# Altium PCB Board_routed.PcbDoc (part 2 of 4)
Units mm, origin at the board's own origin, x right, y up, seen from the top; angles counter-clockwise.
Board outline 115.4 x 92.5 mm, 2 copper layers (Top Layer, Bottom Layer); 95 components, 82 nets, 440 pads, 192 vias.
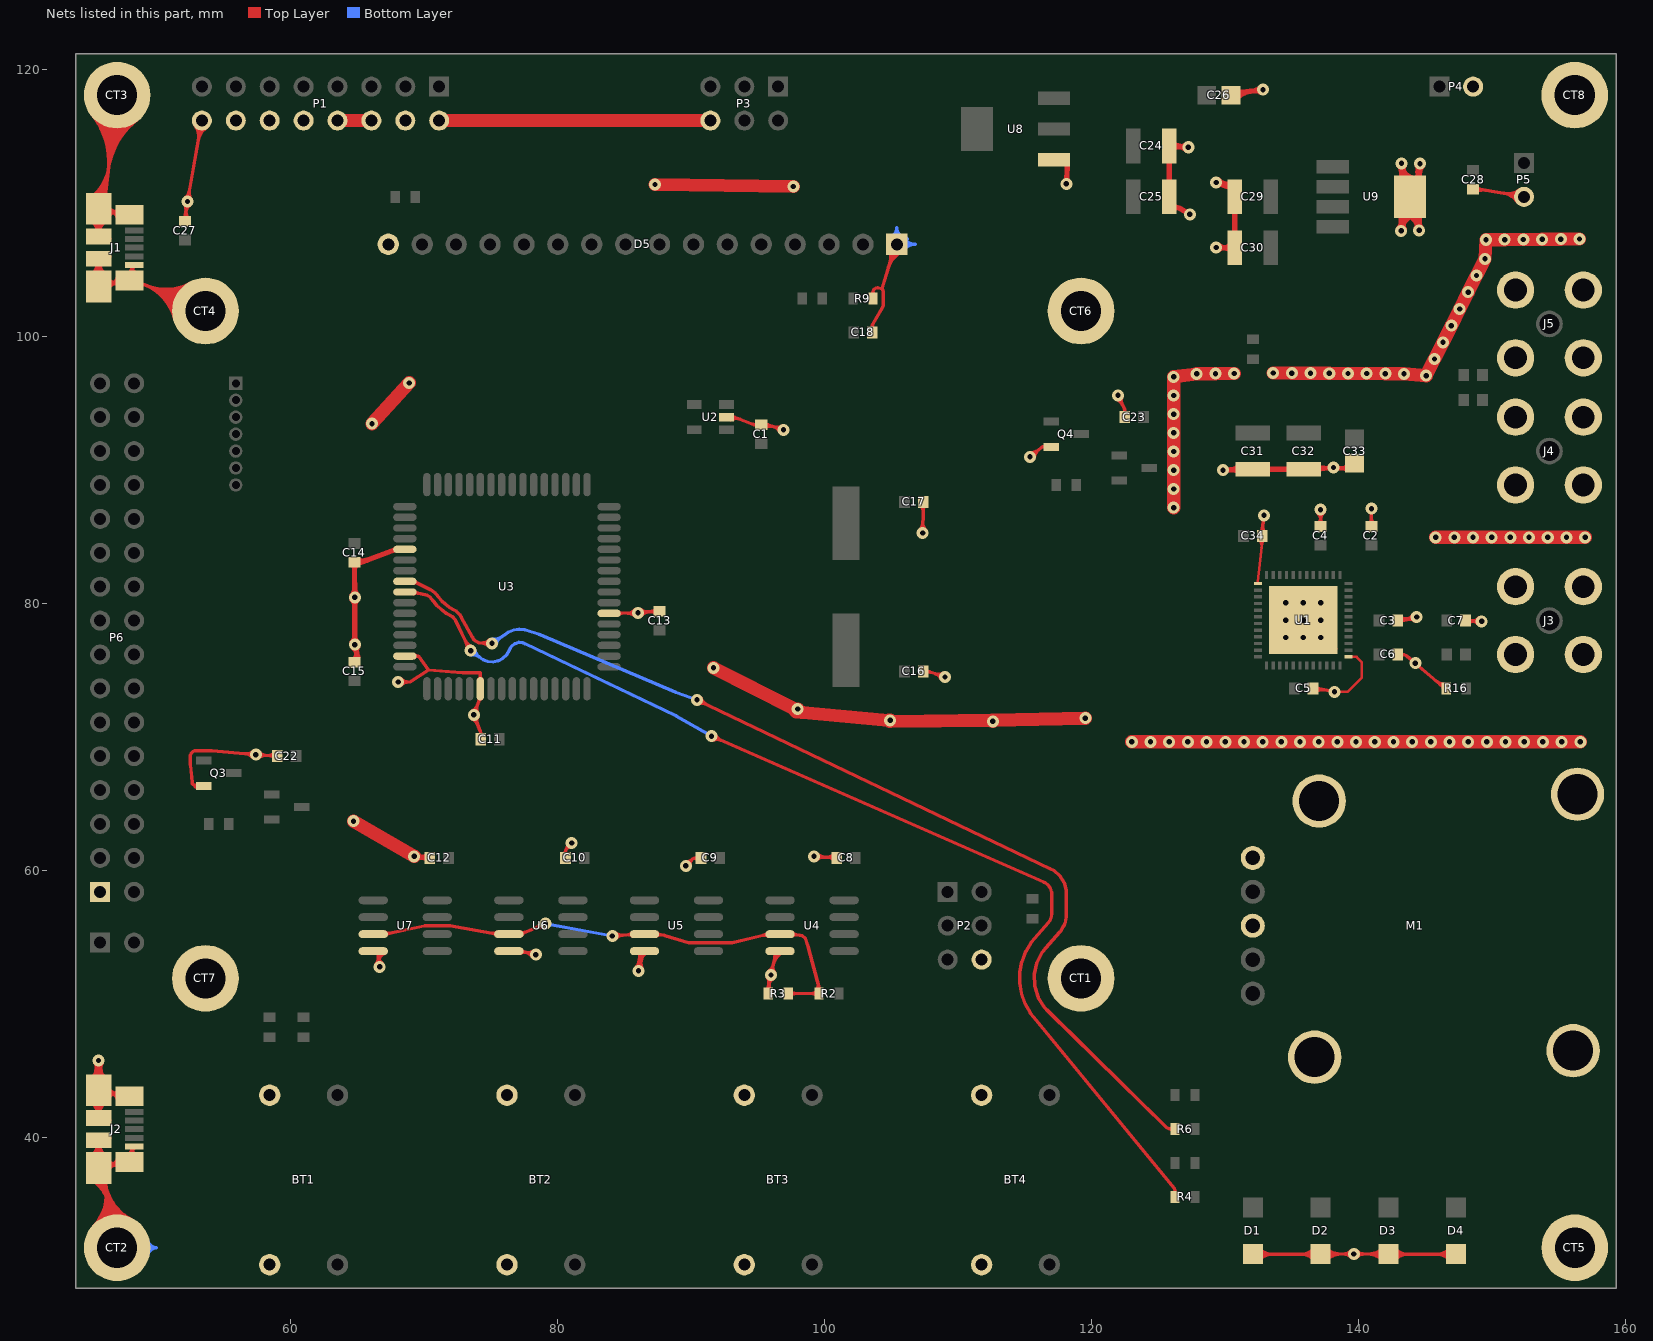
[diagram p2: the nets of this part, all layers, seen from the top]

## Via types
v1: diameter 0.9, hole 0.4, Top Layer to Bottom Layer, 183 vias
v2: diameter 0.8, hole 0.4, Top Layer to Bottom Layer, tented top, 9 vias

## Nets (pads, with @x,y where several pads share a name; then routed paths per layer and width w, separated by ;. In a path a pad name is that pad's centre, name@x,y a point inside that pad or via, vN(x,y) a via of type N, cw(c..) or ccw(c..) an arc to the next point about the centre after c; other vN are vias at no path point) (continued)
EE_NWP: R2.2 R3.2 U4.3 U5.3 U6.3 U7.3 | length 49.4
  Top Layer w0.254: U7.3@66.18,55.245 66.853,55.245 66.98,55.245 66.995,55.245 67.026,55.248 67.041,55.251 69.991,55.861 70.037,55.87 70.133,55.88 70.18,55.88 70.187,55.88 70.473,55.874 70.48,55.874 70.493,55.874 70.499,55.875 70.588,55.879 70.607,55.88 71.353,55.88 71.372,55.879 71.461,55.875 71.468,55.874 71.481,55.874 71.487,55.874 71.773,55.88 71.78,55.88 71.82,55.88 71.9,55.873 71.94,55.866 75.489,55.249 75.501,55.247 75.527,55.245 75.54,55.245 75.667,55.245 U6.3@76.34,55.245 77.013,55.245 77.14,55.245 77.17,55.245 77.228,55.257 77.255,55.268 v1(79.083,56.03) ; U7.3@67.075,55.39 ccw(c67.316,55.756) 67.405,55.326 ; U7.3@67.125,55.15 cw(c67.456,54.932) 67.376,55.32 ; 75.117,55.314 ccw(c75.191,55.74) U6.3@75.44,55.386 ; 75.138,55.31 cw(c75.069,54.914) U6.3@75.399,55.145 ; U6.3@77.206,55.405 ccw(c77.395,55.864) 77.586,55.406 ; U6.3@77.3,55.179 cw(c77.613,55.05) 77.483,55.363 ; v1@78.785,56.153 cw(c78.063,56.45) 78.363,55.73 cw(c78.663,55.01) v1@78.96,55.731 ; v1(84.091,55.109) 85.674,55.244 85.681,55.244 85.694,55.245 85.7,55.245 85.827,55.245 U5.3@86.5,55.245 87.173,55.245 87.3,55.245 87.31,55.245 87.331,55.244 87.342,55.242 87.973,55.153 87.995,55.15 88.037,55.141 88.058,55.135 89.798,54.605 91.961,54.61 92.239,54.61 93.076,54.605 95.634,55.218 95.69,55.232 95.802,55.245 95.86,55.245 95.987,55.245 U4.3@96.66,55.245 97.333,55.245 97.46,55.245 97.469,55.245 97.488,55.244 97.497,55.243 98.145,55.163 98.306,55.143 98.554,54.936 98.604,54.782 98.811,54.14 98.818,54.115 99.568,51.341 99.574,51.319 99.58,51.273 ; v1@84.299,55.356 ccw(c84.802,55.952) 84.868,55.175 ccw(c84.934,54.398) v1@84.338,54.901 ; 85.281,55.21 cw(c85.317,54.791) U5.3@85.588,55.113 ; 85.286,55.211 ccw(c85.251,55.623) U5.3@85.568,55.357 ; U5.3@87.404,55.107 cw(c87.661,54.765) 87.721,55.189 ; U5.3@87.438,55.349 ccw(c87.764,55.594) 87.707,55.191 ; 95.385,55.159 cw(c95.504,54.664) U4.3@95.77,55.098 ; 95.51,55.189 ccw(c95.434,55.506) U4.3@95.713,55.335 ; R3.2@97.27,50.8 97.493,50.8 97.62,50.8 99.23,50.8 99.357,50.8 R2.2@99.58,50.8 99.58,51.123 99.58,51.25 99.58,51.273 ; R3.2@97.428,50.642 cw(c97.808,50.262) 97.808,50.8 cw(c97.808,51.338) R3.2@97.428,50.958 ; U4.3@97.566,55.109 cw(c97.828,54.773) 97.88,55.195 ; U4.3@97.596,55.351 ccw(c97.92,55.603) 97.869,55.197 ; R2.2@99.387,51.011 ccw(c98.613,51.455) 99.474,51.688 ; R2.2@99.422,50.642 ccw(c99.042,50.262) 99.042,50.8 ccw(c99.042,51.338) R2.2@99.422,50.958 ; R2.2@99.474,51.096 ccw(c99.379,51.273) 99.58,51.273 ; R2.2@99.686,51.096 cw(c99.781,51.273) 99.58,51.273
  Bottom Layer w0.254: v1(79.083,56.03) v1(84.091,55.109)
GND: BT1.3 BT1.4 BT2.3 BT2.4 BT3.3 BT3.4 BT4.3 BT4.4 C1.1 C2.1 C3.1 C4.1 C5.1 C6.1 C7.1 C8.1 C9.1 C10.1 C11.1 C12.1 C13.2 C14.1 C15.1 C16.1 C17.1 C18.2 C22.2 C23.2 C24.1 C25.1 C26.1 C27.2 C28.2 C29.1 C30.1 C31.1 C32.1 C33.1 C34.2 CT1.1 CT2.1 CT3.1 CT4.1 CT5.1 CT6.1 CT7.1 CT8.1 D1.2 D2.2 D3.2 D4.2 D5.1 D5.16 J1.5 J1.DP0 J1.DP1 J1.DP2 J1.DP3 J1.DP4 J1.DP5 J2.5 J2.DP0 J2.DP1 J2.DP2 J2.DP3 J2.DP4 J2.DP5 J3.2 J3.3 J3.4 J3.5 J4.2 J4.3 J4.4 J4.5 J5.2 J5.3 J5.4 J5.5 M1.3 M1.5 M1.DP0 M1.DP1 M1.DP2 M1.DP3 P1.2 P1.4 P1.6 P1.8 P1.10 P1.12 P1.14 P1.16 P2.6 P3.6 P4.2 P5.2 P6.1 Q3.2 Q4.2 R3.1 R9.1 R16.2 U1.1 U1.25 U1.49 U2.2 U3.6 U3.22 U3.53 U3.63 U4.4 U5.4 U6.4 U7.4 U8.1 U9.5 | length 770.7
  Top Layer w0.2: C34.2@132.546,84.852 cw(c131.863,84.301) 132.736,84.207 ; U1.1@132.66,81.52 U1.1@132.46,81.52 132.46,81.645 132.778,84.597 132.779,84.608 132.78,84.629 ; C34.2@132.689,84.754 cw(c132.649,84.629) 132.78,84.629 ; 132.759,84.423 cw(c133.326,84.362) C34.2@132.968,84.806 ; C34.2@132.78,85.09 132.78,84.629 ; C34.2@132.871,84.754 ccw(c132.911,84.629) 132.78,84.629 ; U1.49@133.71,81.22 v2(135.86,78.77) U1.49@138.31,76.62 ; U1.49@133.982,80.91 cw(c133.13,80.163) U1.49@134.261,80.09 ; U1.49@134.3,80.547 cw(c133.812,80.119) U1.49@134.46,80.077 ; U1.49@134.363,80.476 ccw(c134.6,80.684) U1.49@134.58,80.369 ; U1.49@134.54,79.771 cw(c134.467,78.64) U1.49@135.318,79.387 ; U1.49@134.553,79.97 cw(c134.511,79.322) U1.49@135,79.75 ; U1.49@134.859,80.05 ccw(c135.174,80.03) U1.49@134.937,79.822 ; U1.49@135.561,78.79 ccw(c134.838,78.837) 135.382,79.314 ccw(c135.927,79.792) U1.49@135.88,79.069 ; U1.49@135.88,78.471 cw(c135.927,77.748) 136.404,78.292 cw(c136.882,78.837) U1.49@136.159,78.79 ; U1.49@136.477,78.228 cw(c135.73,77.377) U1.49@136.861,77.45 ; U1.49@136.84,77.91 cw(c136.412,77.421) U1.49@137.06,77.463 ; U1.49@136.912,77.847 ccw(c137.12,78.084) U1.49@137.14,77.769 ; U1.49@137.167,77.37 cw(c137.209,76.722) U1.49@137.637,77.21 ; U1.49@137.18,77.171 cw(c137.253,76.04) U1.49@138,76.892 ; U1.49@137.459,77.49 ccw(c137.774,77.51) U1.49@137.566,77.273 ; v1(138.197,73.404) 139.179,73.404 140.25,74.475 140.25,75.615 139.845,76.02 U1.25@139.26,76.02
  Top Layer w0.254: J2.DP4@45.018,44.372 ccw(c43.618,45.775) v1(45.6,45.775) ; J2.DP1@45.052,38.579 ccw(c43.96,39.802) J2.DP2@45.6,39.803 ccw(c47.24,39.802) J2.DP1@46.148,38.579 ; J2.DP4@45.052,42.701 cw(c43.96,41.478) J2.DP3@45.6,41.477 cw(c47.24,41.478) J2.DP4@46.148,42.701 ; J1.DP1@45.052,104.619 ccw(c43.96,105.842) J1.DP2@45.6,105.843 ccw(c47.24,105.842) J1.DP1@46.148,104.619 ; J1.DP4@45.052,108.741 cw(c43.96,107.518) J1.DP3@45.6,107.517 cw(c47.24,107.518) J1.DP4@46.148,108.741 ; J1.DP4@45.091,110.476 ccw(c43.007,113.122) 46.351,112.725 ; CT3.1@45.126,116.641 cw(c40.626,113.096) 46.315,112.421 cw(c52.004,111.746) CT3.1@48.459,116.246 ; J1.DP4@45.129,110.505 ccw(c43.506,112.833) 46.324,112.498 ; J2.DP1@45.132,36.813 cw(c43.348,34.232) 46.434,34.796 ; J2.DP4@45.198,44.193 ccw(c44.23,45.162) 45.6,45.162 ccw(c46.97,45.162) J2.DP4@46.002,44.193 ; J2.DP1@45.221,38.39 ccw(c44.466,39.235) 45.6,39.235 ccw(c46.734,39.235) J2.DP1@45.979,38.39 ; J2.DP4@45.221,42.89 cw(c44.466,42.045) 45.6,42.045 cw(c46.734,42.045) J2.DP4@45.979,42.89 ; J1.DP1@45.221,104.43 ccw(c44.466,105.275) 45.6,105.275 ccw(c46.734,105.275) J1.DP1@45.979,104.43 ; J1.DP4@45.221,108.93 cw(c44.466,108.085) 45.6,108.085 cw(c46.734,108.085) J1.DP4@45.979,108.93 ; CT2.1@45.236,33.349 ccw(c42.54,35.808) 46.13,36.463 ; J1.DP4@45.248,110.277 ccw(c43.543,112.441) 46.279,112.116 ; J2.DP2@45.274,39.477 cw(c44.488,38.691) 45.6,38.691 cw(c46.712,38.691) J2.DP2@45.926,39.477 ; J2.DP3@45.274,41.803 ccw(c44.488,42.589) 45.6,42.589 ccw(c46.712,42.589) J2.DP3@45.926,41.803 ; J1.DP2@45.274,105.517 cw(c44.488,104.731) 45.6,104.731 cw(c46.712,104.731) J1.DP2@45.926,105.517 ; J1.DP3@45.274,107.843 ccw(c44.488,108.629) 45.6,108.629 ccw(c46.712,108.629) J1.DP3@45.926,107.843 ; J1.DP4@45.275,110.297 ccw(c43.939,112.211) 46.257,111.936 ; J2.DP1@45.276,37.022 cw(c43.841,34.946) 46.324,35.399 ; v1@45.32,45.614 cw(c44.645,45.224) 45.398,45.022 cw(c46.151,44.82) v1@45.761,45.495 ; CT3.1@45.325,116.799 cw(c41.307,113.633) 46.387,113.03 cw(c51.467,112.427) CT3.1@48.301,116.445 ; J2.DP1@45.327,36.714 cw(c44.837,35.32) 46.29,35.585 ; v1@45.372,45.547 cw(c44.82,44.995) 45.6,44.995 cw(c46.38,44.995) v1@45.828,45.547 ; J1.DP4@45.405,110.077 ccw(c44.08,111.759) 46.206,111.507 ; J2.DP1@45.411,36.953 cw(c45.004,35.795) 46.212,36.016 ; J2.DP1@45.421,37.231 cw(c44.334,35.659) 46.214,36.002 ; J1.DP4@45.42,110.088 ccw(c44.373,111.59) 46.191,111.374 ; CT2.1@45.424,33.178 ccw(c43.016,35.374) 46.222,35.959 ccw(c49.428,36.544) CT2.1@47.951,33.639 ; v1@45.439,45.495 cw(c45.049,44.82) 45.802,45.022 cw(c46.555,45.224) v1@45.88,45.614 ; J2.DP1@45.492,38.781 ccw(c45.465,38.986) 45.665,38.932 ; J2.DP4@45.492,42.499 cw(c45.465,42.294) 45.665,42.348 ; J1.DP1@45.492,104.821 ccw(c45.465,105.026) 45.665,104.972 ; J1.DP4@45.492,108.539 cw(c45.465,108.334) 45.665,108.388 ; J2.DP1@45.497,37.192 cw(c45.183,36.281) 46.132,36.453 ; CT3.1@45.525,116.956 cw(c41.988,114.17) 46.459,113.639 cw(c50.93,113.108) CT3.1@48.144,116.645 ; 45.535,38.932 ccw(c45.735,38.986) J2.DP1@45.708,38.781 ; 45.535,42.348 cw(c45.735,42.294) J2.DP4@45.708,42.499 ; 45.535,104.972 ccw(c45.735,105.026) J1.DP1@45.708,104.821 ; 45.535,108.388 cw(c45.735,108.334) J1.DP4@45.708,108.539 ; J1.DP4@45.562,109.878 ccw(c44.617,111.078) 46.134,110.898 ; CT2.1@45.612,33.007 ccw(c43.492,34.939) 46.314,35.454 ccw(c49.136,35.969) CT2.1@47.835,33.412 ; P6.1@45.72,58.42 P6.1@46.343,58.097 ; CT3.1@45.725,117.113 cw(c42.669,114.706) 46.532,114.248 cw(c50.394,113.789) CT3.1@47.987,116.845 ; CT2.1@45.8,32.835 ccw(c43.969,34.505) 46.406,34.95 ccw(c48.844,35.394) CT2.1@47.72,33.186 ; CT3.1@45.924,117.27 cw(c43.351,115.243) 46.604,114.857 cw(c49.857,114.471) CT3.1@47.83,117.044 ; CT2.1@45.987,32.664 ccw(c44.445,34.07) 46.498,34.445 ccw(c48.551,34.82) CT2.1@47.605,32.96 ; J2.DP1@46.105,38.228 ccw(c46.558,38.464) 46.558,37.953 ; J2.DP4@46.105,43.052 cw(c46.558,42.816) 46.558,43.328 ; J1.DP1@46.105,104.268 ccw(c46.558,104.504) 46.558,103.993 ; J1.DP4@46.105,109.092 cw(c46.558,108.856) 46.558,109.368 ; 46.123,110.803 cw(c44.823,110.958) J1.DP4@45.565,109.88 ; 46.123,110.808 cw(c44.813,110.964) J1.DP4@45.565,109.88 ; 46.124,110.812 cw(c44.806,110.969) J1.DP4@45.565,109.88 ; CT3.1@46.124,117.427 cw(c44.032,115.78) 46.676,115.466 cw(c49.32,115.152) CT3.1@47.673,117.244 ; 46.133,36.446 ccw(c45.171,36.27) 45.496,37.193 cw(c45.167,36.267) 46.134,36.443 ; J2.DP4@46.182,44.372 cw(c47.582,45.775) v1(45.6,45.775) ; J2.DP1@46.32,37.566 cw(c46.977,37.201) J2.DP0@46.977,37.953 ; J2.DP4@46.32,43.714 ccw(c46.977,44.079) J2.DP5@46.977,43.328 ; J1.DP1@46.32,103.606 cw(c46.977,103.241) J1.DP0@46.977,103.993 ; J1.DP4@46.32,109.754 ccw(c46.977,110.119) J1.DP5@46.977,109.368 ; J2.DP1@46.33,38.345 ccw(c46.977,38.682) J2.DP0@46.977,37.953 ; J2.DP4@46.33,42.935 cw(c46.977,42.598) J2.DP5@46.977,43.328 ; J1.DP1@46.33,104.385 ccw(c46.977,104.722) J1.DP0@46.977,103.993 ; J1.DP4@46.33,108.975 cw(c46.977,108.638) J1.DP5@46.977,109.368 ; J2.DP2@46.423,39.963 J2.DP2@45.6,39.803 J2.DP1@45.6,37.727 ; J2.DP3@46.423,41.317 J2.DP3@45.6,41.477 J2.DP4@45.6,43.553 ; J1.DP2@46.423,106.003 J1.DP2@45.6,105.843 J1.DP1@45.6,103.767 J1.DP1@46.423,103.993 ; J1.DP3@46.423,107.357 J1.DP3@45.6,107.517 J1.DP4@45.6,109.593 ; 46.658,37.953 cw(c46.658,37.248) J2.DP0@47.156,37.746 ; 46.657,43.328 ccw(c46.657,44.033) J2.DP5@47.156,43.534 ; 46.658,103.993 cw(c46.658,103.288) J1.DP0@47.156,103.786 ; 46.657,109.368 ccw(c46.657,110.073) J1.DP5@47.156,109.574 ; 46.777,37.953 ccw(c46.777,38.452) J2.DP0@47.25,38.292 ; 46.777,43.328 cw(c46.777,42.828) J2.DP5@47.25,42.988 ; 46.777,103.993 ccw(c46.777,104.492) J1.DP0@47.25,104.332 ; 46.777,109.368 cw(c46.777,108.868) J1.DP5@47.25,109.028 ; CT2.1@46.99,31.75 46.13,36.463 ; CT3.1@46.99,118.11 46.126,110.83 46.125,110.818 46.123,110.792 46.123,110.653 J1.DP4@45.6,109.593 ; J2.DP0@47.009,38.373 cw(c46.423,38.571) J2.DP1@46.423,37.953 ; J2.DP5@47.009,42.907 ccw(c46.423,42.709) J2.DP4@46.423,43.328 ; J1.DP0@47.009,104.413 cw(c46.423,104.611) J1.DP1@46.423,103.993 ; J1.DP5@47.009,108.947 ccw(c46.423,108.749) J1.DP4@46.423,109.368 ; J2.DP0@47.807,38.634 ccw(c47.267,39.242) J2.5@48.08,39.242 ; J1.DP0@47.807,104.674 ccw(c47.267,105.282) J1.5@48.08,105.282 ; J2.DP5@47.9,43.102 J2.DP5@46.977,43.328 ; J1.DP5@47.9,109.142 J1.DP5@46.977,109.368 ; CT2.1@48.066,33.865 cw(c49.72,37.118) 46.13,36.463 ; J2.DP0@48.08,38.76 cw(c48.726,38.76) J2.5@48.321,39.264 ; J1.DP0@48.08,104.8 cw(c48.726,104.8) J1.5@48.321,105.304 ; J2.5@48.26,39.34 J2.5@48.08,39.242 ; J1.5@48.26,105.38 J1.5@48.08,105.282 ; J2.DP0@48.423,38.751 cw(c48.603,39.242) J2.5@48.08,39.242 ; J1.DP0@48.423,104.791 cw(c48.603,105.282) J1.5@48.08,105.282 ; J1.DP0@48.555,104.317 ccw(c49.117,104.48) 48.999,103.906 ; J1.DP0@48.561,104.295 ccw(c49.042,104.4) J1.DP0@48.942,103.918 ; J1.DP0@48.643,103.785 cw(c48.939,103.488) J1.DP0@48.94,103.908 ; CT4.1@51.317,101.324 ccw(c47.592,100.334) 49.119,103.872 ; CT4.1@51.562,101.389 ccw(c48.236,100.505) 49.6,103.665 ccw(c50.964,106.825) CT4.1@52.602,103.798 ; CT4.1@51.808,101.455 ccw(c48.88,100.676) 50.081,103.457 ccw(c51.281,106.239) CT4.1@52.723,103.574 ; C27.2@51.96,108.871 ccw(c51.763,109.142) 52.094,109.09 ; C27.2@51.98,108.908 ccw(c51.925,109.067) 52.093,109.067 ; v1@52,109.952 cw(c51.369,109.494) 52.139,109.371 cw(c52.909,109.249) v1@52.451,109.88 ; CT4.1@52.053,101.52 ccw(c49.524,100.848) 50.561,103.25 ccw(c51.598,105.652) CT4.1@52.843,103.351 ; C27.2@52.07,108.65 52.093,108.923 52.093,109.067 ; v1@52.077,110.406 ccw(c51.63,111.046) 52.398,110.909 ccw(c53.166,110.773) v1@52.526,110.326 ; 52.166,109.542 ccw(c53.137,109.387) C27.2@52.341,108.81 ; C27.2@52.198,108.891 cw(c52.292,109.067) 52.093,109.067 ; CT4.1@52.299,101.585 ccw(c50.169,101.019) 51.042,103.042 ccw(c51.916,105.066) CT4.1@52.964,103.128 ; CT4.1@52.481,104.021 cw(c50.647,107.411) 49.119,103.872 ; 52.643,66.497 ccw(c52.873,66.751) Q3.2@53.097,66.491 ; P1.16@52.829,115.848 cw(c51.596,114.988) 53.077,114.724 cw(c54.557,114.461) P1.16@53.697,115.694 ; 52.856,66.304 ccw(c53.062,66.532) Q3.2@53.263,66.299 ; P1.16@53.037,115.994 cw(c52.307,115.484) 53.184,115.328 cw(c54.061,115.172) P1.16@53.551,115.902 ; Q3.2@53.087,66.238 ccw(c52.794,65.947) 52.794,66.36 ; Q3.2@53.087,66.482 cw(c52.794,66.773) 52.794,66.36 ; P1.16@53.34,116.205 v1(52.261,110.141) 52.098,109.117 52.096,109.1 52.093,109.067 ; Q3.2@53.485,66.36 52.794,66.36 ; CT4.1@53.61,101.934 49.119,103.872 ; v1@57.133,68.49 ccw(c56.535,67.989) 56.603,68.765 ccw(c56.672,69.542) v1@57.173,68.945 ; v1@57.59,68.451 cw(c58.096,67.858) 58.158,68.636 cw(c58.219,69.413) v1@57.626,68.907 ; 58.185,68.634 ccw(c58.252,69.494) C22.2@58.813,68.838 ; 58.472,68.611 cw(c58.436,68.157) C22.2@58.782,68.453 ; C22.2@58.731,68.495 ccw(c58.582,68.446) 58.582,68.603 ; C22.2@58.747,68.704 cw(c58.582,68.788) 58.582,68.603 ; C22.2@58.748,68.453 ccw(c58.494,68.318) 58.506,68.606 ccw(c58.518,68.907) C22.2@58.766,68.736 ; C22.2@58.752,68.446 ccw(c58.475,68.289) 58.488,68.607 ccw(c58.502,68.94) C22.2@58.77,68.742 ; C22.2@58.99,68.58 58.717,68.603 58.582,68.603 ; C15.1@64.77,75.63 64.795,75.63 C15.1@64.795,75.662 ; U7.4@66.18,53.975 66.553,53.802 66.553,53.662 66.554,53.637 66.556,53.624 v1(66.654,52.8) ; v1@66.401,53 ccw(c65.788,53.482) 66.562,53.574 ccw(c67.336,53.667) v1@66.854,53.054 ; 66.576,53.454 cw(c67.133,53.521) U7.4@66.954,54.052 ; v1@66.613,53.144 cw(c67.234,53.218) U7.4@67.035,53.811 ; v1(68.045,74.139) 68.919,74.143 70.31,75.038 70.316,75.041 ; v1@68.273,74.368 ccw(c68.822,74.922) 68.825,74.142 ccw(c68.829,73.363) v1@68.275,73.912 ; U3.63@68.55,76.08 69.023,76.08 69.573,76.081 70.316,75.042 ; U3.63@69.255,75.976 cw(c69.509,75.723) 69.508,76.081 ; U3.63@69.254,76.185 ccw(c69.506,76.437) 69.507,76.081 ; 70.02,60.983 C12.1@70.147,60.983 ; v1@73.577,71.97 ccw(c73.254,72.68) 73.984,72.406 ccw(c74.714,72.132) v1@74.004,71.809 ; v1@73.583,71.379 cw(c73.276,70.662) 74,70.952 cw(c74.724,71.242) v1@74.007,71.549 ; U3.6@74.065,72.969 cw(c73.685,72.796) 74.076,72.65 ; U3.6@74.095,74.335 ccw(c73.846,74.584) 74.198,74.584 ; 74.106,72.729 cw(c74.384,72.624) U3.6@74.261,72.895 ; C11.1@74.11,70.145 ccw(c74.014,70.338) 74.23,70.338 ; U3.6@74.199,73.776 74.198,74.839 72.869,74.845 70.316,75.042 ; 74.198,74.591 ccw(c74.56,74.591) U3.6@74.305,74.335 ; U3.6@74.2,73.776 U3.6@74.2,73.63 74.2,73.03 74.2,73.005 74.191,72.956 74.182,72.933 v1(73.71,71.676) 74.201,70.449 74.216,70.413 74.23,70.339 ; C11.1@74.23,69.85 74.23,70.339 ; C11.1@74.35,70.145 cw(c74.446,70.338) 74.23,70.338 ; U6.4@76.34,53.975 77.157,53.975 77.19,53.971 77.207,53.967 v1(78.362,53.704) ; U6.4@77.232,53.829 cw(c77.468,53.453) 77.567,53.885 ; U6.4@77.286,54.067 ccw(c77.618,54.276) 77.531,53.894 ; v1@78.089,53.532 ccw(c77.428,53.117) 77.602,53.877 ccw(c77.775,54.638) v1@78.19,53.978 ; C10.1@80.443,61.246 ccw(c80.305,61.484) 80.58,61.484 ; C10.1@80.58,60.96 80.58,61.484 ; C10.1@80.717,61.246 cw(c80.855,61.484) 80.58,61.484 ; v1@80.728,62.003 cw(c80.319,61.903) 80.633,61.622 ; v1@80.967,61.766 ccw(c80.899,61.482) 80.682,61.677 ; v1@80.967,61.766 ccw(c80.899,61.482) 80.682,61.677 ; v1@81.001,61.759 ccw(c80.948,61.339) 80.633,61.622 ; v1(81.042,62.08) 80.682,61.677 ; U3.22@83.85,79.28 84.45,79.28 84.457,79.28 v1(86.021,79.318) 87.137,79.438 87.148,79.439 87.17,79.44 ; U3.22@84.552,79.387 ccw(c84.799,79.646) 84.807,79.289 ccw(c84.816,78.932) U3.22@84.557,79.178 ; v1@85.787,79.541 cw(c85.223,80.079) 85.242,79.299 cw(c85.261,78.52) v1@85.799,79.084 ; v1@85.837,52.735 ccw(c85.323,53.321) 86.101,53.27 ccw(c86.88,53.219) v1@86.293,52.705 ; v1@85.908,52.782 ccw(c85.657,53.289) 86.193,53.107 ; v1(86.05,52.492) 86.126,53.647 86.127,53.675 86.127,53.802 U5.4@86.5,53.975 ; v1@86.066,52.734 cw(c87.681,52.628) U5.4@86.614,53.845 ; 86.106,53.346 cw(c87.109,53.28) U5.4@86.447,54.036 ; v1@86.224,79.57 ccw(c86.714,80.177) 86.797,79.401 ccw(c86.88,78.626) v1@86.273,79.116 ; 86.29,53.394 ccw(c87.232,53.075) v1@86.34,52.635 ; 86.812,79.403 cw(c86.899,78.596) C13.2@87.409,79.228 ; 87.027,79.426 ccw(c86.973,79.929) C13.2@87.368,79.611 ; C13.2@87.328,79.334 ccw(c87.17,79.268) 87.17,79.44 ; C13.2@87.328,79.546 cw(c87.17,79.612) 87.17,79.44 ; C13.2@87.63,79.44 87.17,79.44 ; v1(89.6,60.36) 90.033,60.807 ; v1@89.65,60.679 ccw(c89.718,61.113) 90.033,60.807 ; v1@89.917,60.42 cw(c90.348,60.502) 90.033,60.807 ; C9.1@90.498,61.086 cw(c90.253,61.212) 90.253,60.937 ; C9.1@90.518,60.801 ccw(c90.253,60.611) 90.253,60.937 ; C9.1@90.74,60.96 90.467,60.937 90.253,60.937 ; U2.2@92.64,93.98 93.22,93.98 ; U2.2@92.945,93.799 cw(c93.331,92.928) 93.674,93.816 ; U2.2@93.034,93.876 cw(c93.22,93.761) 93.22,93.98 ; U2.2@93.034,94.084 ccw(c93.22,94.199) 93.22,93.98 ; C1.1@94.955,93.29 ccw(c94.763,93.196) 94.763,93.41 ; C1.1@94.955,93.53 cw(c94.763,93.624) 94.763,93.41 ; C1.1@95.309,93.393 cw(c95.551,92.919) 95.715,93.426 ; C1.1@95.424,93.167 cw(c95.946,92.147) 96.298,93.237 ; C1.1@95.547,93.293 cw(c95.732,93.205) 95.732,93.41 ; C1.1@95.547,93.527 ccw(c95.732,93.615) 95.732,93.41 ; R3.1@95.666,51.097 ccw(c95.574,51.27) 95.77,51.27 ; v1@95.705,52.014 cw(c95.042,51.603) 95.802,51.425 cw(c96.561,51.247) v1@96.15,51.91 ; R3.1@95.77,50.8 95.77,51.27 ; v1@95.803,52.455 ccw(c95.379,53.109) 96.142,52.947 ccw(c96.904,52.785) v1@96.25,52.36 ; 95.855,51.654 ccw(c96.675,51.462) R3.1@95.959,51.018 ; R3.1@95.874,51.097 cw(c95.966,51.27) 95.77,51.27 ; 96.141,52.943 cw(c97.509,52.652) U4.4@96.753,53.829 ; 96.268,53.539 cw(c97.046,53.373) 96.616,54.043 ccw(c97.039,53.378) 96.268,53.543 ; 96.271,53.553 cw(c97.018,53.393) U4.4@96.618,54.044 ; v1@96.635,92.888 ccw(c95.94,92.533) 96.18,93.275 ccw(c96.42,94.017) v1@96.775,93.323 ; U4.4@96.66,53.975 96.287,53.802 96.287,53.652 96.282,53.608 96.278,53.586 v1(95.979,52.184) 95.779,51.33 95.775,51.31 95.77,51.27 ; v1(96.922,93.035) 95.823,93.391 95.793,93.4 95.732,93.41 ; v1(99.2,61.075) 100.47,60.984 100.477,60.984 100.493,60.983 ; v1@99.412,60.831 cw(c99.923,60.241) 99.978,61.019 cw(c100.034,61.797) v1@99.444,61.286 ; 100.102,61.01 ccw(c100.163,61.86) C8.1@100.721,61.216 ; 100.375,60.991 cw(c100.341,60.526) C8.1@100.694,60.831 ; C8.1@100.64,60.876 ccw(c100.493,60.828) 100.493,60.983 ; C8.1@100.657,61.084 cw(c100.493,61.167) 100.493,60.983 ; C8.1@100.663,60.825 ccw(c100.383,60.665) 100.395,60.987 ccw(c100.408,61.327) C8.1@100.681,61.123 ; C8.1@100.667,60.819 ccw(c100.366,60.637) 100.38,60.987 ccw(c100.394,61.358) C8.1@100.685,61.129 ; C8.1@100.9,60.96 100.627,60.983 100.493,60.983 ; C18.2@103.442,100.621 ccw(c103.33,100.833) 103.57,100.833 ; R9.1@103.492,103.152 ccw(c103.318,103.399) 103.62,103.399 ; C18.2@103.57,100.33 103.57,100.833 ; R9.1@103.62,102.87 103.62,103.399 ; C18.2@103.698,100.621 cw(c103.81,100.833) 103.57,100.833 ; R9.1@103.748,103.152 cw(c103.922,103.399) 103.62,103.399 ; 104.762,105.165 cw(c106.663,104.588) D5.1@105.727,106.34 ; D5.1@104.816,106.617 cw(c103.703,106.022) 104.911,105.655 ; D5.1@104.861,106.545 cw(c104.217,106.088) 104.973,105.858 cw(c105.523,105.691) D5.1@105.471,106.264 ; D5.1@104.934,106.458 cw(c104.686,106.21) D5.1@105.037,106.21 ; 104.94,105.752 cw(c106.255,105.353) D5.1@105.607,106.564 ; D5.1@105.05,106.192 cw(c105.834,106.076) D5.1@105.483,106.786 ; D5.1@105.41,106.934 105.037,106.261 105.037,106.103 105.028,106.04 105.019,106.01 104.29,103.61 ; v1@107.118,85.536 ccw(c106.578,86.098) 107.357,86.082 ccw(c108.137,86.066) v1@107.574,85.526 ; C17.1@107.183,87.391 cw(c106.687,86.915) 107.374,86.901 ; v1(107.341,85.302) 107.38,87.172 107.38,87.18 C17.1@107.38,87.63 ; 107.375,86.941 cw(c108.006,86.928) C17.1@107.569,87.383 ; C16.1@107.38,74.93 107.653,74.907 107.815,74.907 ; C16.1@107.616,74.792 cw(c107.815,74.676) 107.815,74.907 ; C16.1@107.634,75.03 ccw(c107.815,75.102) 107.815,74.907 ; v1@108.727,74.367 ccw(c108.027,74.023) 108.279,74.761 ccw(c108.53,75.499) v1@108.874,74.799 ; v1(109.017,74.509) 107.918,74.884 107.885,74.895 107.815,74.907 ; v1(115.385,91.011) 116.22,91.692 116.26,91.725 116.358,91.76 ; v1@115.417,91.332 ccw(c115.496,92.108) 115.989,91.504 ccw(c116.482,90.9) v1@115.706,90.978 ; Q4.2@116.573,91.654 ccw(c116.358,91.489) 116.358,91.76 ; Q4.2@116.573,91.866 cw(c116.358,92.031) 116.358,91.76 ; Q4.2@116.985,91.76 116.358,91.76 ; U8.1@117.2,113.27 117.9,113.27 U8.1@118.108,113.259 ; v1@121.864,95.315 cw(c121.599,94.582) 122.305,94.913 cw(c123.011,95.244) v1@122.278,95.509 ; v1(121.974,95.619) 122.452,94.6 122.471,94.56 122.49,94.474 ; C23.2@122.367,94.274 ccw(c122.265,94.474) 122.49,94.474 ; C23.2@122.49,93.98 122.49,94.474 ; C23.2@122.613,94.274 cw(c122.715,94.474) 122.49,94.474 ; v1@127.228,114.259 v1(127.255,114.204) ; C26.1@130.44,118.11 C26.1@130.454,118.165 ; D1.2@132.08,31.27 D2.2@137.16,31.27 137.783,31.28 v1(139.645,31.28) 141.617,31.28 D3.2@142.24,31.27 D4.2@147.32,31.27 ; D1.2@132.341,31.009 cw(c132.971,30.379) 132.971,31.27 cw(c132.971,32.161) D1.2@132.341,31.531 ; D1.2@132.521,30.829 cw(c133.584,29.766) 133.584,31.27 cw(c133.584,32.774) D1.2@132.521,31.711 ; C34.2@132.615,85.357 ccw(c132.334,85.726) 132.793,85.663 ; C34.2@132.673,85.391 ccw(c132.603,85.553) 132.78,85.553 ; C34.2@132.78,85.09 132.78,85.553 ; 132.83,85.938 ccw(c133.678,85.823) C34.2@132.997,85.305 ; C34.2@132.887,85.391 cw(c132.957,85.553) 132.78,85.553 ; v1(132.924,86.628) 132.784,85.594 132.782,85.581 132.78,85.553 ; C5.1@136.59,73.66 136.863,73.637 137.011,73.637 ; D2.2@136.719,30.829 ccw(c135.656,29.766) 135.656,31.27 ccw(c135.656,32.774) D2.2@136.719,31.711 ; C5.1@136.741,73.383 cw(c137.321,72.512) 137.527,73.538 ; C5.1@136.817,73.761 ccw(c137.043,73.912) 136.99,73.646 ; C5.1@136.83,73.529 cw(c137.011,73.43) 137.011,73.637 ; C5.1@136.847,73.752 ccw(c137.011,73.812) 137.011,73.637 ; D2.2@136.899,31.009 ccw(c136.269,30.379) 136.269,31.27 ccw(c136.269,32.161) D2.2@136.899,31.531 ; v1@136.929,86.823 cw(c136.378,86.271) 137.157,86.271 cw(c137.937,86.271) v1@137.386,86.823 ; C4.1@136.967,85.983 ccw(c136.507,86.443) 137.157,86.443 ; 137.157,86.456 ccw(c137.826,86.456) C4.1@137.353,85.983 ; v1(137.157,87.051) 137.157,86.063 C4.1@137.16,85.79 ; D2.2@137.421,31.009 cw(c138.076,30.354) 138.076,31.28 ; D2.2@137.421,31.531 ccw(c138.025,32.135) 138.025,31.28 ; D2.2@137.601,30.829 cw(c138.689,29.741) 138.689,31.28 ; D2.2@137.601,31.711 ccw(c138.639,32.749) 138.639,31.28 ; v1(138.197,73.404) 137.074,73.629 137.053,73.633 137.011,73.637 ; C33.1@139.127,90.267 C33.1@139.7,90.54 ; v1@139.417,31.052 ccw(c138.865,30.501) 138.865,31.28 ccw(c138.865,32.06) v1@139.417,31.509 ; v1@139.873,31.052 cw(c140.425,30.501) 140.425,31.28 cw(c140.425,32.06) v1@139.873,31.509 ; 140.711,31.28 cw(c140.711,29.741) D3.2@141.799,30.829 ; 140.761,31.28 ccw(c140.761,32.749) D3.2@141.799,31.711 ; C2.1@140.777,85.983 ccw(c140.318,86.442) 140.967,86.442 ; 140.967,86.456 ccw(c141.636,86.456) C2.1@141.163,85.983 ; v1(140.967,87.128) 140.967,86.063 C2.1@140.97,85.79 ; 141.324,31.28 cw(c141.324,30.354) D3.2@141.979,31.009 ; 141.375,31.28 ccw(c141.375,32.135) D3.2@141.979,31.531 ; D3.2@142.501,31.009 cw(c143.131,30.379) 143.131,31.27 cw(c143.131,32.161) D3.2@142.501,31.531 ; D3.2@142.681,30.829 cw(c143.744,29.766) 143.744,31.27 cw(c143.744,32.774) D3.2@142.681,31.711 ; C6.1@142.94,76.2 143.213,76.177 143.34,76.177 143.414,76.177 ; C3.1@142.94,78.74 143.213,78.763 143.367,78.763 ; C3.1@142.95,78.806 ccw(c143.216,79.26) 143.348,78.751 ; C3.1@143.078,79.025 ccw(c143.655,80.008) v1@143.942,78.905 ; C6.1@143.165,76.046 cw(c143.414,75.876) 143.414,76.177 ; C3.1@143.178,78.874 ccw(c143.367,78.979) 143.367,78.763 ; C6.1@143.185,76.32 ccw(c143.414,76.432) 143.414,76.177 ; C3.1@143.196,78.644 cw(c143.367,78.58) 143.367,78.763 ; v1@144.079,79.177 cw(c143.406,79.572) 143.603,78.817 cw(c143.799,78.063) v1@144.194,78.735 ; v1(144.357,79.014) 143.448,78.777 143.421,78.77 143.367,78.763 ; 145.799,74.229 ccw(c146.474,75.016) R16.2@146.553,73.982 ; 146.141,73.936 ccw(c146.287,74.107) R16.2@146.429,73.933 ; R16.2@146.347,73.683 R16.2@146.57,73.683 ; R16.2@146.352,73.715 ccw(c146.058,73.654) 146.17,73.932 ccw(c146.293,74.238) R16.2@146.458,73.953 ; R16.2@146.358,73.692 ccw(c145.956,73.564) 146.113,73.955 ccw(c146.286,74.384) R16.2@146.478,73.963 ; R16.2@146.57,73.66 146.57,73.76 146.569,73.763 146.545,73.83 146.43,73.915 146.359,73.919 146.21,73.926 146.18,73.928 146.123,73.951 146.1,73.97 v1(144.254,75.555) 143.61,76.081 143.553,76.127 143.414,76.177 ; D4.2@146.879,30.829 ccw(c145.816,29.766) 145.816,31.27 ccw(c145.816,32.774) D4.2@146.879,31.711 ; D4.2@147.059,31.009 ccw(c146.429,30.379) 146.429,31.27 ccw(c146.429,32.161) D4.2@147.059,31.531 ; C7.1@148.02,78.74 148.293,78.717 148.42,78.717 148.435,78.717 v1(149.23,78.688) ; C7.1@148.22,78.876 ccw(c148.599,79.229) 148.58,78.712 ; C7.1@148.233,78.519 cw(c148.63,78.201) 148.648,78.709 ; C28.2@148.59,111.06 149.04,111.06 149.057,111.06 ; C28.2@148.798,110.837 cw(c149.323,110.095) 149.477,110.991 ; C28.2@148.863,111.218 ccw(c149.196,111.454) 149.127,111.051 ; C28.2@148.89,110.95 cw(c149.058,110.877) 149.057,111.06 ; C28.2@148.89,111.169 ccw(c149.056,111.24) 149.057,111.06 ; v1@148.994,78.468 ccw(c148.423,77.937) 148.451,78.716 ccw(c148.479,79.495) v1@149.01,78.925 ; P5.2@151.891,110.13 ccw(c150.663,109.262) 150.918,110.744 ccw(c151.172,112.227) P5.2@152.04,110.999 ; P5.2@152.099,110.277 ccw(c151.371,109.762) 151.522,110.64 ccw(c151.672,111.519) P5.2@152.187,110.791 ; P5.2@152.4,110.49 149.108,111.054 149.091,111.057 149.057,111.06 ; J2.DP1@45.6,37.727 46.123,36.667 46.123,36.521 46.126,36.482 46.13,36.463 ; J2.DP1@45.6,37.727 J2.DP1@46.423,37.953 ; J2.DP4@45.6,43.553 J2.DP4@46.423,43.328 ; J2.DP4@45.6,43.553 v1(45.6,45.775) ; J1.DP4@45.6,109.593 J1.DP4@46.423,109.368 ; J1.DP4@46.247,110.339 cw(c46.724,110.715) 46.121,110.787 ccw(c46.724,110.715) J1.DP4@46.247,110.339 ; J1.DP4@46.246,110.339 cw(c46.723,110.714) 46.121,110.786 ccw(c46.723,110.714) J1.DP4@46.246,110.339 ; J2.DP1@46.423,37.953 J2.DP0@46.977,37.953 ; J2.DP4@46.423,43.328 J2.DP5@46.977,43.328 ; J1.DP1@46.423,103.993 J1.DP0@46.977,103.993 ; J1.DP4@46.423,109.368 J1.DP5@46.977,109.368 ; J2.DP0@46.977,37.953 J2.DP0@47.9,38.178 48.08,38.789 J2.5@48.08,39.242 ; J1.DP0@46.977,103.993 J1.DP0@47.9,104.218 ; J1.DP0@47.9,104.218 48.823,103.908 48.95,103.908 48.994,103.907 49.079,103.89 49.119,103.872 ; J1.DP0@47.9,104.218 48.08,104.829 J1.5@48.08,105.282 ; 52.794,66.36 52.623,66.516 52.611,66.631 52.485,67.918 52.484,67.929 52.483,67.95 52.483,68.56 52.483,68.645 52.548,68.802 52.668,68.922 52.825,68.987 52.91,68.987 54.069,68.987 54.088,68.986 54.097,68.985 v1(57.38,68.697) 58.556,68.604 58.565,68.604 58.582,68.603 ; 80.58,61.484 80.633,61.622 ; 80.633,61.622 80.682,61.677 ; 80.682,61.677 ccw(c80.465,61.87) 80.738,61.97 cw(c80.464,61.871) 80.682,61.677 ; 90.033,60.807 90.094,60.869 90.253,60.937 ; 93.22,93.98 93.279,93.969 93.307,93.958 94.656,93.437 94.69,93.424 94.763,93.41 ; 94.763,93.41 95.732,93.41 ; 103.57,100.833 103.598,100.936 103.625,100.982 104.339,102.205 104.367,102.254 104.397,102.363 104.397,102.42 104.397,103.383 104.36,103.504 104.326,103.556 104.29,103.61 ; 103.62,103.399 103.688,103.542 103.811,103.642 103.965,103.679 104.042,103.662 104.29,103.61 ; J2.DP1@46.117,36.592 cw(c46.622,36.638) 46.232,36.963 ccw(c46.622,36.638) J2.DP1@46.117,36.592 ; 46.142,36.396 cw(c46.965,36.546) 46.277,37.022 ccw(c46.965,36.546) 46.142,36.396 ; 46.142,36.398 cw(c46.963,36.547) 46.277,37.022 ccw(c46.963,36.547) 46.142,36.398 ; D5.1@104.87,106.533 cw(c104.242,106.068) 105.015,105.953 ccw(c104.242,106.068) D5.1@104.87,106.533 ; 146.117,73.956 ccw(c146.288,74.155) 146.44,73.941 cw(c146.288,74.155) 146.117,73.956
  Top Layer w0.4: v1@64.617,80.661 ccw(c64.185,81.083) 64.788,81.09 ccw(c65.392,81.097) v1@64.97,80.665 ; v1@64.619,77.109 ccw(c64.192,77.535) 64.795,77.535 ccw(c65.399,77.535) v1@64.972,77.109 ; v1@64.619,80.31 cw(c64.192,79.883) 64.795,79.883 cw(c65.399,79.883) v1@64.972,80.31 ; C14.1@64.648,82.961 cw(c64.46,82.715) 64.77,82.715 ; v1@64.665,76.719 cw(c64.35,76.204) 64.937,76.345 cw(c65.523,76.486) v1@65.009,76.801 ; C15.1@64.702,75.791 ccw(c64.357,76.261) 64.924,76.398 ; 64.772,82.505 cw(c65.442,82.512) C14.1@64.963,82.98 ; C15.1@64.795,75.662 64.968,75.907 64.994,75.945 65.011,76.035 65.001,76.08 v1(64.795,76.932) v1(64.795,80.486) 64.77,82.715 ; C14.1@64.892,82.961 ccw(c65.08,82.715) 64.77,82.715 ; C14.1@64.904,83.302 ccw(c65.339,84.244) 65.698,83.27 ; C14.1@64.972,82.99 cw(c65.255,82.747) 65.255,83.12 ; C14.1@64.972,83.25 ccw(c65.255,83.493) 65.255,83.12 ; U3.53@68.55,84.08 67.926,84.08 67.878,84.072 67.855,84.063 65.358,83.145 65.325,83.132 65.255,83.12 ; v1(69.247,61.081) 70.02,60.983 ; v1@69.4,60.883 cw(c69.77,60.406) 69.845,61.005 cw(c69.921,61.604) v1@69.444,61.234 ; 69.747,61.018 ccw(c69.841,61.757) C12.1@70.297,61.168 ; C12.1@70.147,60.983 70.42,60.983 C12.1@70.42,60.96 ; U8.1@117.974,113.337 cw(c117.358,112.784) 118.185,112.739 ; U8.1@118.106,113.239 118.102,113.213 118.104,113.158 118.11,113.131 118.181,112.817 118.185,112.803 118.187,112.773 118.186,112.758 v1(118.114,111.462) ; U8.1@118.106,113.24 118.106,113.244 118.107,113.252 118.107,113.256 U8.1@118.108,113.259 ; C24.1@126.057,114.053 cw(c126.556,113.554) 126.556,114.259 ; C24.1@126.057,114.547 ccw(c126.753,115.243) 126.753,114.259 ; C25.1@126.085,109.524 cw(c126.427,109.254) 126.428,109.69 ; C25.1@126.129,109.884 ccw(c126.429,110.018) 126.428,109.69 ; 126.519,114.259 cw(c126.519,113.468) v1@127.078,114.028 ; 126.784,114.259 ccw(c126.784,114.675) v1@127.078,114.381 ; v1@127.228,114.259 126.16,114.259 C24.1@125.81,114.3 C25.1@125.81,110.49 126.16,109.69 126.36,109.69 126.428,109.69 ; v1(127.356,109.177) 126.617,109.619 126.558,109.654 126.428,109.69 ; v1(129.337,106.689) 130.38,106.689 C30.1@130.73,106.68 C29.1@130.73,110.49 130.38,111.29 130.136,111.29 ; v1(129.337,111.564) 130.01,111.32 130.051,111.305 130.136,111.29 ; v1@129.498,111.372 cw(c129.77,111.049) 129.806,111.47 ; v1@129.514,106.512 cw(c129.94,106.085) 129.94,106.689 cw(c129.94,107.292) v1@129.514,106.866 ; v1@129.529,111.494 ccw(c129.982,112.745) C29.1@130.574,111.553 ; v1@129.528,111.725 ccw(c130.128,112.229) 130.061,111.448 ; v1(129.845,90.014) 130.766,90.04 ; 129.864,106.689 cw(c129.864,105.814) C30.1@130.483,106.433 ; 129.907,106.689 ccw(c129.907,107.503) C30.1@130.483,106.927 ; C29.1@130.406,111.108 ccw(c130.136,110.999) 130.136,111.29 ; C29.1@130.448,111.448 cw(c130.136,111.678) 130.136,111.29 ; C26.1@130.454,118.165 131.14,118.165 ; C26.1@130.797,118.461 ccw(c131.156,118.814) 131.156,118.31 ; C26.1@130.835,117.803 cw(c132.077,116.84) 131.88,118.399 ; C26.1@130.877,117.867 cw(c131.739,117.387) 131.616,118.366 ; C26.1@130.94,118.099 cw(c131.156,118.094) 131.156,118.31 ; C26.1@130.94,118.165 C26.1@130.44,118.11 130.94,118.31 131.156,118.31 ; C31.1@131,90.207 cw(c130.763,90.291) 130.767,90.04 ; C31.1@131.038,89.897 ccw(c130.771,89.72) 130.767,90.04 ; v1@132.643,118.674 cw(c132.166,119.044) 132.242,118.445 cw(c132.317,117.846) v1@132.687,118.323 ; v1(132.841,118.521) 131.203,118.314 131.187,118.312 131.156,118.31 ; C32.1@136.915,90.306 ccw(c137.249,90.569) 137.28,90.145 ccw(c137.31,89.741) C32.1@136.95,89.928 ; C32.1@136.914,90.307 ccw(c137.251,90.574) 137.283,90.145 ccw(c137.313,89.737) C32.1@136.95,89.927 ; C32.1@136.918,90.303 ccw(c137.241,90.55) 137.271,90.145 ccw(c137.299,89.757) C32.1@136.952,89.932 ; C32.1@136.932,90.283 ccw(c137.199,90.46) 137.199,90.14 ; C32.1@136.971,89.977 cw(c137.199,89.9) 137.199,90.14 ; C32.1@137.063,90.213 136.64,90.09 C32.1@135.89,90.09 ; C33.1@139.127,90.267 139.127,90.212 139.046,90.136 138.99,90.14 v1(138.119,90.207) 137.226,90.141 137.217,90.141 137.199,90.14 ; v1@143.022,108.123 ccw(c142.595,108.55) 143.199,108.55 ccw(c143.802,108.55) v1@143.375,108.123 ; v1@143.041,112.818 cw(c142.614,112.391) 143.218,112.391 cw(c143.822,112.391) v1@143.395,112.818 ; v1@143.08,108.167 ccw(c142.777,108.725) 143.391,108.561 ; v1@143.093,112.778 cw(c142.791,112.256) 143.374,112.412 cw(c143.957,112.568) v1@143.435,112.87 ; v1@143.199,107.844 cw(c144.543,107.844) U9.5@144.157,109.132 ; v1(143.199,107.947) 143.199,109.09 U9.5@143.87,110.49 ; v1@143.199,108.382 cw(c144.382,108.382) U9.5@144.042,109.515 ; U9.5@143.199,108.919 cw(c144.221,108.919) U9.5@143.927,109.898 ; U9.5@143.218,111.975 ccw(c144.135,111.975) U9.5@143.918,111.084 ; 143.218,112.485 ccw(c144.26,112.485) U9.5@144.013,111.473 ; 143.307,108.785 ccw(c144.175,108.552) v1@143.411,108.078 ; 143.364,108.461 ccw(c143.859,108.328) v1@143.415,108.072 ; U9.5@143.593,109.129 cw(c143.23,107.87) v1@144.54,107.87 ; U9.5@143.704,109.513 cw(c143.383,108.402) v1@144.54,108.402 ; U9.5@143.815,109.898 cw(c143.537,108.934) U9.5@144.54,108.934 ; U9.5@144.008,110.745 ccw(c142.758,112.055) U9.5@144.568,112.013 ; U9.5@144.108,111.861 cw(c144.385,112.995) v1(143.218,112.995) 143.218,111.89 U9.5@143.87,110.49 ; v1@144.323,108.099 ccw(c143.88,108.355) 144.375,108.487 ; v1@144.329,108.108 ccw(c143.601,108.572) 144.435,108.795 ; 144.352,108.57 ccw(c144.925,108.724) v1@144.654,108.196 ; v1@144.363,108.151 ccw(c143.936,108.577) 144.54,108.577 ccw(c145.144,108.577) v1@144.717,108.151 ; v1@144.423,112.806 cw(c143.979,112.398) 144.582,112.372 cw(c145.185,112.347) v1@144.777,112.791 ; v1(144.54,107.974) 144.54,109.09 U9.5@143.87,110.49 ; v1(144.608,112.975) 144.571,112.112 144.57,112.09 144.57,111.89 U9.5@143.87,110.49 ; 64.77,82.715 C14.1@64.77,83.12 65.255,83.12 ; 130.766,90.04 130.78,90.04 130.98,90.04 C31.1@132.08,90.09 C32.1@135.89,90.09 ; C32.1@135.89,90.09 136.99,90.14 137.199,90.14 ; 130.403,90.03 ccw(c130.376,90.992) 131.076,90.331 cw(c130.376,90.992) 130.403,90.03 ; 130.57,90.034 cw(c130.59,89.308) 131.089,89.836 ccw(c130.59,89.308) 130.57,90.034 ; C26.1@130.747,118.505 ccw(c131.263,119.171) 131.368,118.335 cw(c131.263,119.171) C26.1@130.747,118.505 ; C26.1@130.748,118.504 ccw(c131.261,119.16) 131.362,118.333 cw(c131.261,119.16) C26.1@130.748,118.504 ; C26.1@130.77,118.485 ccw(c131.22,118.997) 131.264,118.317 cw(c131.22,118.997) C26.1@130.77,118.485 ; C32.1@136.879,90.345 ccw(c137.383,90.883) 137.407,90.147 cw(c137.383,90.883) C32.1@136.879,90.345 ; U9.5@143.735,111.037 ccw(c141.914,113.022) 144.605,112.906 cw(c141.914,113.022) U9.5@143.735,111.037 ; U9.5@144.005,110.743 ccw(c142.837,112.016) 144.563,111.941 cw(c142.837,112.016) U9.5@144.005,110.743 ; v1@144.386,112.86 cw(c143.797,112.552) 144.431,112.353 ccw(c143.797,112.552) v1@144.386,112.86 ; 144.457,112.436 cw(c144.974,112.273) 144.723,112.754 ccw(c144.974,112.273) 144.457,112.436
  Top Layer w1: P1.8@63.5,116.205 P1.6@66.04,116.205 ; v1(64.702,63.712) v1(69.247,61.081) ; v1(66.089,93.497) v1(68.874,96.547) ; P1.2@71.12,116.205 P3.6@91.44,116.205 ; v1(87.291,111.411) v1(97.65,111.259) ; v1(91.669,75.198) v1@97.75,72.119 ; v1@97.942,72.087 ccw(c98.455,72.514) 98.394,71.849 ; v1(97.98,72.119) v1@97.75,72.119 ; v1(104.908,71.272) v1@104.814,71.261 ; v1(112.604,71.195) v1@112.55,71.261 ; v1(119.532,71.426) 112.603,71.281 112.589,71.28 112.563,71.271 112.552,71.263 v1@112.55,71.261 ; v1(123.016,69.656) v1(124.416,69.656) v1(125.816,69.656) v1(127.216,69.656) v1(128.616,69.656) v1(130.016,69.656) v1(131.416,69.656) v1(132.816,69.656) v1(134.216,69.656) v1(135.616,69.656) v1(137.016,69.656) v1(138.416,69.656) v1(139.816,69.656) v1(141.216,69.656) v1(142.616,69.656) v1(144.016,69.656) v1(145.416,69.656) v1(146.816,69.656) v1(148.216,69.656) v1(149.616,69.656) v1(151.016,69.656) v1(152.416,69.656) v1(153.816,69.656) v1(155.216,69.656) v1(156.616,69.656) ; v1(126.151,87.205) v1(126.151,88.605) v1(126.151,90.005) v1(126.151,91.405) v1(126.151,92.805) v1(126.151,94.205) v1(126.151,95.605) v1(126.151,97.005) v1(127.878,97.224) v1(129.278,97.236) v1(130.678,97.248) ; v1(133.607,97.291) v1(135.007,97.282) v1(136.407,97.274) v1(137.807,97.265) v1(139.207,97.256) v1(140.607,97.248) v1(142.007,97.239) v1(143.407,97.231) v1(145.065,97.09) v1(145.695,98.34) v1(146.325,99.591) v1(146.954,100.841) v1(147.584,102.091) v1(148.214,103.342) v1(148.843,104.592) v1(149.473,105.843) v1(149.554,107.274) v1(150.954,107.285) v1(152.354,107.296) v1(153.754,107.307) v1(155.154,107.318) v1(156.554,107.329) ; v1(145.778,84.973) v1(147.178,84.973) v1(148.578,84.973) v1(149.978,84.973) v1(151.378,84.973) v1(152.778,84.973) v1(154.178,84.973) v1(155.578,84.973) v1(156.978,84.973) ; v1@97.75,72.119 97.75,72.03 97.87,71.897 97.959,71.889 v1@104.814,71.261 ; v1@104.814,71.261 104.818,71.225 104.873,71.178 104.909,71.178 v1@112.55,71.261
  Bottom Layer w0.254: CT2.1@46.99,31.75 49.944,31.75 ; CT2.1@49.059,31.293 cw(c49.628,31.168) 49.628,31.75 cw(c49.628,32.332) CT2.1@49.059,32.207 ; CT2.1@49.307,31.239 cw(c49.944,31.098) 49.944,31.75 ; CT2.1@49.307,32.261 ccw(c49.944,32.402) 49.944,31.75 ; P1.16@53.34,116.205 P1.16@53.363,116.227 ; CT7.1@53.61,51.934 CT7.1@53.633,51.911 ; P1.14@55.857,116.182 P1.14@55.88,116.205 ; P1.12@58.397,116.182 P1.12@58.42,116.205 ; BT1.3@58.42,43.18 BT1.3@58.442,43.157 ; P1.10@60.937,116.182 P1.10@60.96,116.205 ; P1.8@63.477,116.182 P1.8@63.5,116.205 ; P1.6@66.04,116.205 P1.6@66.063,116.182 ; D5.16@67.31,106.934 D5.16@67.333,106.911 ; P1.4@68.58,116.205 P1.4@68.603,116.227 ; BT2.3@76.2,43.18 BT2.3@76.222,43.157 ; BT3.3@93.98,43.18 BT3.3@94.002,43.157 ; D5.1@105.038,107.495 ccw(c104.578,108.188) 105.41,108.188 ; D5.1@105.433,106.911 D5.1@105.41,106.934 ; D5.1@105.74,106.676 cw(c106.27,106.261) 106.27,106.934 cw(c106.27,107.607) D5.1@105.74,107.192 ; D5.1@105.782,107.495 cw(c106.242,108.188) 105.41,108.188 ; D5.1@105.94,106.519 cw(c106.791,105.854) 106.791,106.934 ; D5.1@105.94,107.349 ccw(c106.791,108.014) 106.791,106.934 ; D5.1@105.997,107.52 106.21,107.307 106.083,107.307 D5.1@105.41,106.934 ; BT4.3@111.76,43.18 BT4.3@111.782,43.157 ; CT1.1@119.21,51.934 CT1.1@119.233,51.911 ; CT6.1@119.21,101.934 CT6.1@119.233,101.911 ; M1.3@132.08,55.88 M1.3@132.103,55.857 ; M1.DP3@136.71,46.03 M1.DP3@136.733,46.03 ; M1.DP0@137.027,65.243 M1.DP0@137.05,65.22 M1.DP0@137.073,65.22 ; P4.2@148.59,118.745 P4.2@148.613,118.767 ; J3.2@151.765,76.2 J3.2@151.788,76.222 ; J3.5@151.765,81.28 J3.5@151.788,81.302 ; J4.2@151.765,88.9 J4.2@151.788,88.922 ; J4.5@151.765,93.98 J4.5@151.788,94.002 ; J5.2@151.765,98.425 J5.2@151.788,98.447 ; J5.5@151.765,103.505 J5.5@151.788,103.527 ; P5.2@152.4,110.49 P5.2@152.423,110.512 ; M1.DP2@156.08,46.497 M1.DP2@156.08,46.52 ; M1.DP1@156.41,65.73 M1.DP1@156.41,65.753 ; J3.4@156.845,81.28 J3.4@156.868,81.302 ; J4.3@156.845,88.9 J4.3@156.868,88.922 ; J5.3@156.845,98.425 J5.3@156.868,98.447 ; D5.1@105.41,106.934 106.791,106.934 ; D5.1@105.41,106.934 105.41,108.188
  other v2: 134.56,77.47 135.86,77.47 137.16,77.47 134.56,78.77 137.16,78.77 134.56,80.07 135.86,80.07 137.16,80.07
LED0: R4.2 U3.57 | length 88.2
  Top Layer w0.254: U3.57@68.55,80.88 69.023,80.88 69.15,80.88 69.166,80.88 69.198,80.876 69.213,80.873 70.078,80.669 70.211,80.637 70.443,80.492 70.529,80.385 70.689,80.186 70.958,79.853 71.623,79.301 71.999,79.099 72.006,79.096 72.121,79.034 72.301,78.845 72.358,78.726 73.054,77.266 73.097,77.184 v1(73.483,76.491) ; U3.57@69.228,80.754 cw(c69.429,80.429) 69.517,80.801 ; U3.57@69.276,80.958 ccw(c69.558,81.133) 69.482,80.809 ; v1@73.173,76.579 ccw(c72.422,76.792) 73.103,77.172 ccw(c73.784,77.552) v1@73.571,76.802 ; v1(91.52,70.084) 116.415,59.148 116.545,59.091 116.764,58.906 116.919,58.667 117.001,58.393 117.001,58.25 117.001,56.75 117.001,56.572 116.876,56.239 116.759,56.105 115.752,54.951 115.488,54.649 115.07,53.954 114.78,53.197 114.628,52.408 114.616,51.597 114.746,50.797 115.011,50.039 115.408,49.332 115.664,49.021 126.17,36.232 126.209,36.186 126.25,36.071 ; v1@91.637,69.783 cw(c91.92,69.057) 92.234,69.771 cw(c92.547,70.485) v1@91.821,70.201 ; R4.2@126.128,35.847 ccw(c125.983,36.071) 126.25,36.071 ; R4.2@126.25,35.56 126.25,35.883 126.25,36.01 126.25,36.071 ; R4.2@126.372,35.847 cw(c126.518,36.072) 126.25,36.071
  Bottom Layer w0.254: v1(73.483,76.491) 74.249,75.924 74.405,75.808 74.771,75.671 75.16,75.641 75.543,75.721 75.888,75.903 76.169,76.174 76.268,76.344 76.464,76.686 76.541,76.819 76.782,77.012 77.076,77.104 77.384,77.082 77.524,77.015 88.828,71.627 88.839,71.622 88.86,71.611 88.871,71.605 v1(91.52,70.084) ; v1@73.531,76.172 cw(c73.646,75.4) 74.11,76.027 cw(c74.574,76.653) v1@73.803,76.539
LED1: R6.2 U3.56 | length 84.6
  Top Layer w0.254: U3.56@68.55,81.68 69.023,81.68 69.15,81.68 69.182,81.68 69.244,81.665 69.273,81.651 70.479,81.05 70.607,80.985 70.83,80.805 70.92,80.693 71.066,80.51 71.307,80.209 71.894,79.72 72.234,79.537 72.241,79.533 72.406,79.444 72.672,79.183 72.764,79.02 73.633,77.48 73.738,77.294 74.1,77.073 74.313,77.064 ; U3.56@69.197,81.54 cw(c69.342,81.107) 69.545,81.515 ; U3.56@69.29,81.727 ccw(c69.535,81.809) 69.42,81.578 ; v1@74.829,76.819 ccw(c74.283,76.335) 74.313,77.064 ; v1@74.847,77.266 cw(c74.342,77.793) 74.313,77.064 ; v1(75.071,77.033) 74.313,77.064 ; v1(90.44,72.8) 116.921,60.134 117.188,60.007 117.629,59.615 117.944,59.115 118.109,58.547 118.109,58.25 118.109,56.75 118.109,56.563 118.042,56.193 117.91,55.84 117.717,55.517 117.594,55.377 116.587,54.223 116.298,53.892 115.901,53.1 115.715,52.24 115.748,51.361 116.002,50.513 116.456,49.76 116.772,49.449 125.601,40.785 125.661,40.726 125.816,40.663 ; v1@90.547,72.495 cw(c90.807,71.76) 91.143,72.464 cw(c91.48,73.167) v1@90.745,72.907 ; R6.2@126.059,40.525 ccw(c125.816,40.38) 125.816,40.663 ; R6.2@126.081,40.785 cw(c125.816,41.011) 125.816,40.663 ; R6.2@126.25,40.64 126.027,40.663 125.9,40.663 125.816,40.663
  Bottom Layer w0.254: v1(75.071,77.033) 76.158,77.771 76.326,77.886 76.71,78.035 77.114,78.093 77.521,78.061 77.717,77.999 78.546,77.737 78.585,77.724 78.661,77.696 78.701,77.679 88.835,73.375 88.882,73.356 v1(90.44,72.8) ; v1@75.132,77.351 ccw(c75.278,78.116) 75.716,77.471 ccw(c76.154,76.826) v1@75.388,76.973